# Altium PCB BauhallenUhr_Variante_4.PcbDoc (part 2 of 2)
Units mm, origin at the board's own origin, x right, y up, seen from the top; angles counter-clockwise.
Board outline 92.9 x 87.5 mm, 4 copper layers (Top Layer, Signal Layer 2, GND Layer 3, Bottom Layer), stack 1.54 mm thick; 119 components, 79 nets, 565 pads, 100 vias.
Unrouted connection lines stored in the file: 1.
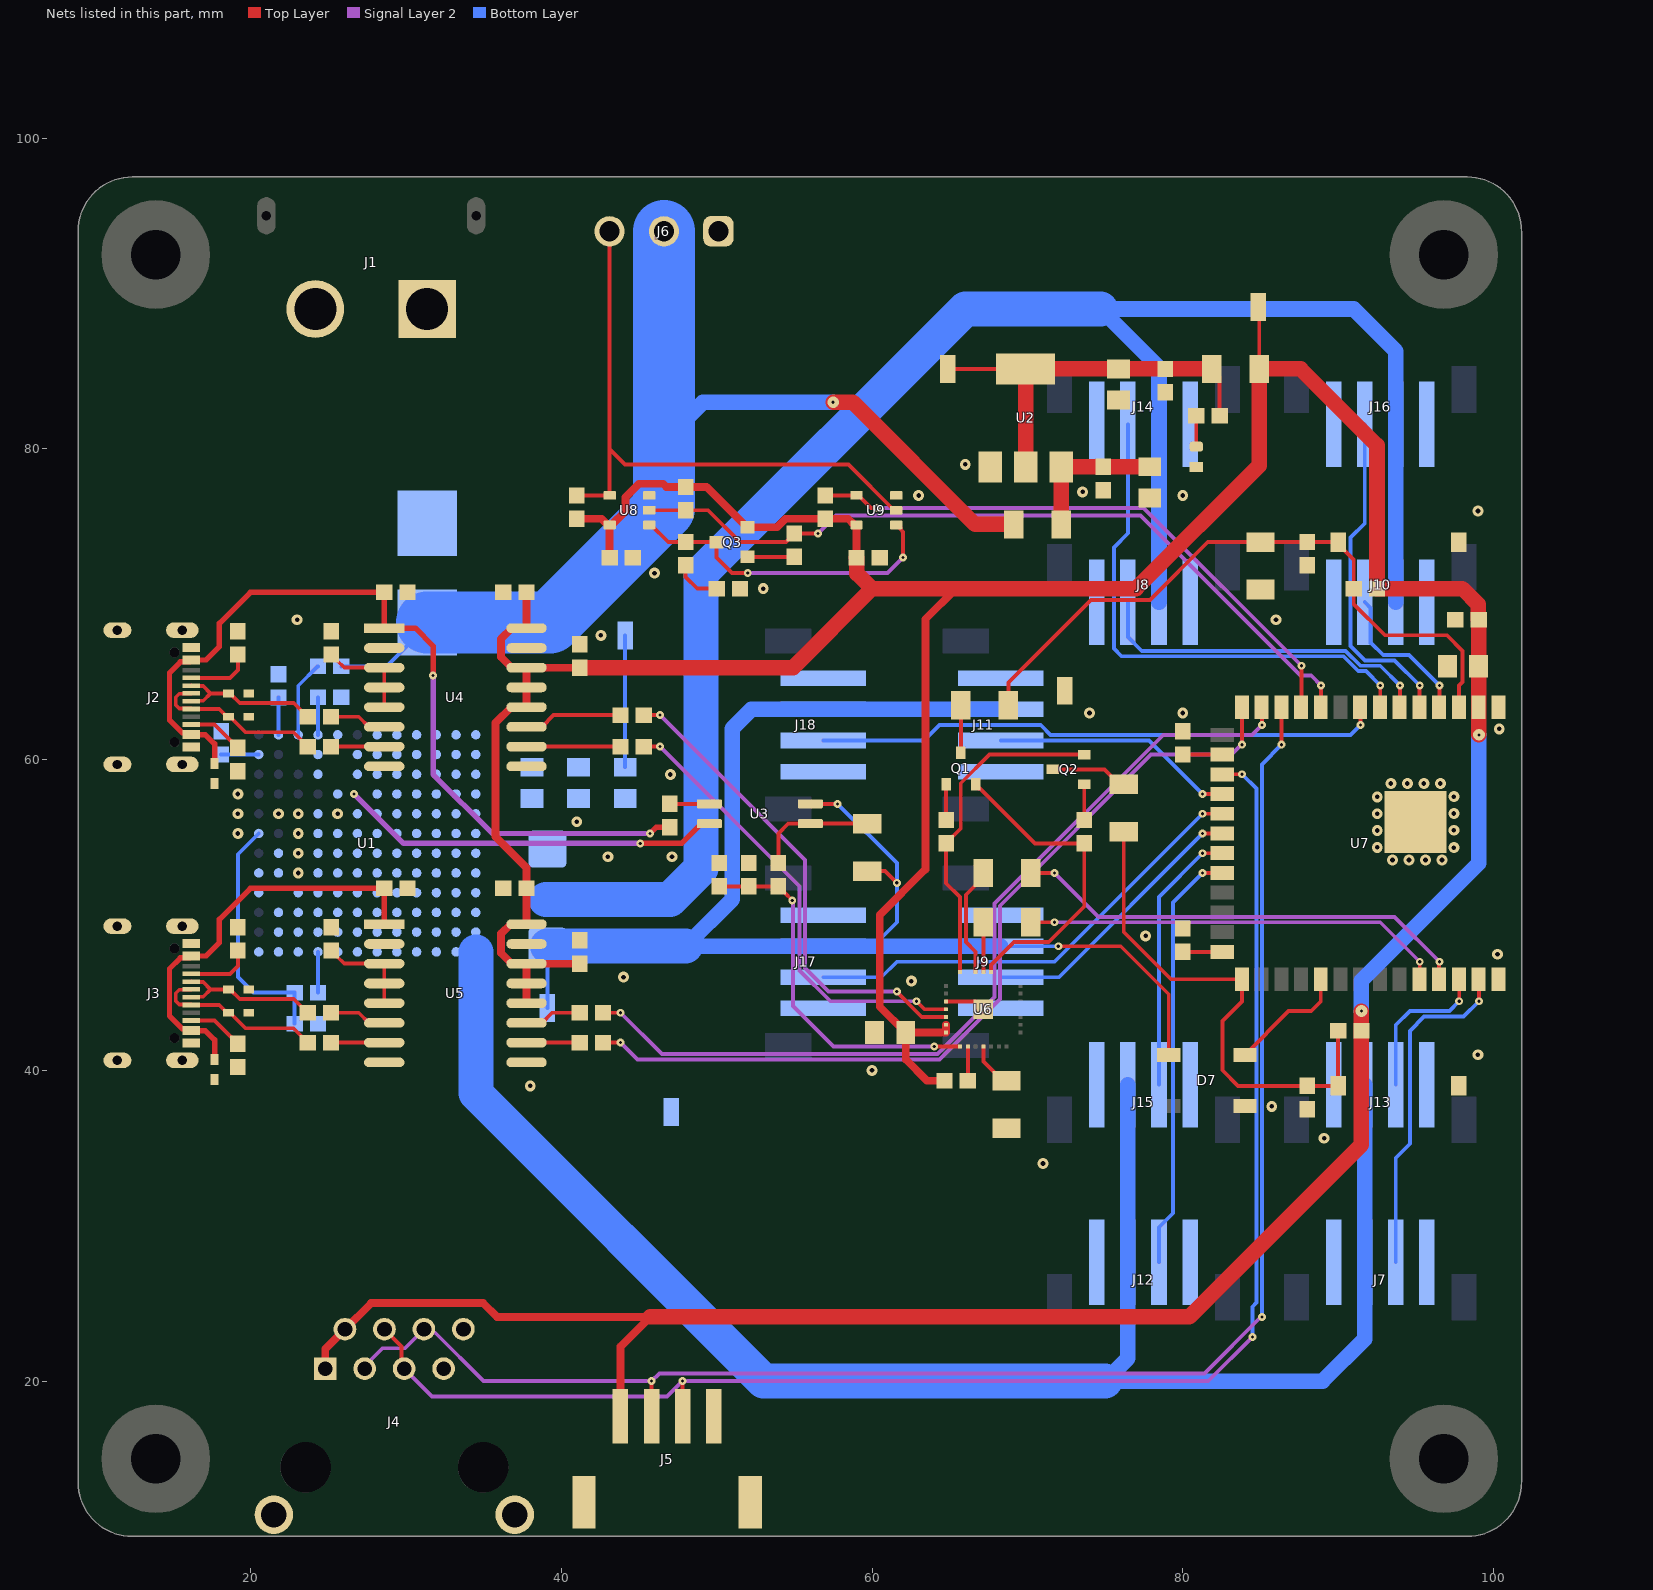
[diagram p4: the nets of this part, all layers, seen from the top]

## Part data
C1 C3 C5 C6 C7: library part Capacitor, "0603"
C2 C4 C9 C10 C11 C21 C22: library part Capacitor_0805, "0805"
C8: library part Capacitor_Tantalum, "470 µF Molded Tantalum Capacitors 6.3 V 2917 (7343 Metric) 100mOhm."
C12 C13 C14 C15 C16 C17 C18 C19 C20 C23 C24 C26 C27 C28: library part Capacitor_0603, "0603"
C25: library part Capacitor_1206, "1206"
D1 D2 D3 D4 D5 D6: library part ESD_Protection_Diode, ComponentLink1Description=Supplier, ComponentLink1URL=https://www.digikey.com/en/products/detail/onsemi/ESD5B5-0ST1G/1792206
F1: library part Fuse, "FUSE BRD MNT 10A 125VAC/VDC SMD"
J1: library part PCB_Connector, "Socket, DC supply, male, PIN: 2.", Package=Package, Check_prices=https://www.snapeda.com/parts/XT60PW-M/AMASS/view-part/?ref=eda, MF=AMASS, MP=XT60PW-M, SnapEDA_Link=https://www.snapeda.com/parts/XT60PW-M/AMASS/view-part/?ref=snap
J2 J3: "USB - C - Port"
J4: library part RJ45, "Jack Modular Connector 8p8c (RJ45, Ethernet) 90Â° Angle (Right) Shielded Cat3.", Package=None, Check_prices=https://www.snapeda.com/parts/RJE091884511C/Amphenol/view-part/?ref=eda, MF="Amphenol ICC (Commercial Products)", MP=RJE091884511C, SnapEDA_Link=https://www.snapeda.com/parts/RJE091884511C/Amphenol/view-part/?ref=snap, System=Connector
J5: library part Connector_SMD_Lying_Small_Symbol, "Connector Header Surface Mount, Right Angle 4 position 0.079 (2.00mm).", ComponentLink1Description=Supplier, ComponentLink1URL=https://www.digikey.ch/de/products/detail/jst-sales-america-inc/S4B-PH-SM4-TB/926657?s=N4IgTCBcDaIMoBYBCBaACgCRXAsglAKkiALoC%2BQA
J6: library part Screw_Connector, "691214110003 Wurth Elektronik"
J7 J8 J9 J10 J11 J12 J13 J14 J15 J16 J17 J18: library part Connector_SMD, "CONN HEADER SMD 4POS 2MM.", ComponentLink1Description=Supplier, ComponentLink1URL=https://www.digikey.ch/en/products/detail/jst-sales-america-inc/B4B-PH-SM4-TB/926643
LED1: library part "LED_0603, GREEN", "LED 0603, Green, 3.2 V, 20 mA, 430 mcd"
MEC1 MEC2 MEC3 MEC4: "Mounting Hole for M3 Screw, plated to connect signal"
Q1 Q2: library part NPN_Bipolar_Transistor, "SS8050 SOT - 23.", ComponentLink1Description=Supplier, ComponentLink1URL=https://www.digikey.com/en/products/detail/guangdong-inmark-electronics-co-ltd/SS8050/28539054
Q3: library part PNP_Bipolar_Transistor, "Bipolar (BJT) Transistor PNP 25 V 500 mA 150MHz 300 mW Surface Mount SOT-23."
R1 R3 R4 R5 R7 R8 R9 R10 R11 R12 R13 R15 R16 R17 R18 R20 R22 R23 R24 R25 R27 R28 R29 R32 R33 R34 R35 R36 R37 R38 R39 R40: library part Resistor_0603, "0603"
R2 R6 R14 R19 R21 R26 R30 R31: library part Resistor_1206, "1206"
S1 S2: library part Button
TP1 TP2 TP3 TP4 TP5 TP6: "Prüfstecker und Messbuchsen EZ BoardWare S27 SMT Mini Test Terminal, Reel"
U1: library part DCDC_Converter, "Module DC-DC 1-OUT 0.6V to 5V 15A Automotive 133-Pin BGA Tray.", Package="BGA -133 Analog Devices", Availability="In Stock", Check_prices=https://www.snapeda.com/parts/LTM4627EY%23PBF/Analog+Devices/view-part/?ref=eda, MF="Analog Devices", MP=LTM4627EY#PBF, Price=None, Purchase-URL=https://pricing.snapeda.com/search/part/LTM4627EY#PBF/?ref=eda, SnapEDA_Link=https://www.snapeda.com/parts/LTM4627EY%23PBF/Analog+Devices/view-part/?ref=snap
U2: "LDO, 3.3V and 800mA.", ComponentLink1Description=Datasheet, ComponentLink1URL=chrome-extension://efaidnbmnnnibpcajpcglclefindmkaj/https://www.st.com/content/ccc/resource/technical/document/datasheet/99/3b/7d/91/91/51/4b/be/CD00000544.pdf/files/CD00000544.pdf/jcr:content/translations/en.CD00000544.pdf, ComponentLink2Description=Supplier, ComponentLink2URL=https://www.digikey.ch/en/products/detail/stmicroelectronics/LD1117S33CTR/585765
U3: library part Optocoupler, "Optoisolator Transistor Output 3750Vrms 1 Channel 4-SO."
U4 U5: library part USB_Digital_Isolator, "DGT ISOL 2500VRMS 2CH USB 16SOIC."
U6: "USB to UART bridge.", ComponentLink1Description=Datasheet, ComponentLink1URL=chrome-extension://efaidnbmnnnibpcajpcglclefindmkaj/https://www.silabs.com/documents/public/data-sheets/cp2102n-datasheet.pdf, ComponentLink2Description=Supplierlink, ComponentLink2URL=https://www.digikey.ch/en/products/detail/silicon-laboratories-inc/CP2102N-A02-GQFN28R/9863486?utm_source=findchips&utm_medium=aggregator&utm_campaign=buynow
U7: library part ESP32-S3-WROOM-2-N32R16V, "Bluetooth, WiFi 802.11b/g/n, Bluetooth v5.0 Transceiver Module 2.4GHz PCB Trace Surface Mount", Manufacturer="Espressif Systems", Supplier 1 Part Number=1965-ESP32-S3-WROOM-2-N32R16VCT-ND, Supplier 2 Part Number=356-SP32S3WM2N32R16V, Assembly Technology=SMD, ComponentLink1Description="Show Datasheet on SMS Drive", ComponentLink1URL="P:\Electronic Workshop\Datasheets (Refered in Libraries - Don't Change!)\ESP32-S3-WROOM-2-N32R16V_Digikey_1965-ESP32-S3-WROOM-2-N32R16VCT-ND.pdf", Latest Revision Date=17.10.2025, Latest Revision Made By="Simon Gimple", Latest Revision Note="New Part", Manufacturer Part Number=ESP32-S3-WROOM-2-N32R16V, Supplier 1=DigiKey, Supplier 2=Mouser
U8: library part Single_Bus_Buffer_Gate, "Single Bus Buffer Gate With 3-State Outputs, DBV0005A, LARGE T&R.", ComponentLink1Description=Supplier, ComponentLink1URL=https://www.digikey.com/en/products/detail/texas-instruments/SN74LVC1G126DBVR/385722
U9: library part Single_Bus_Buffer_Gate_Inverted, "Single Bus Buffer Gate With 3-State Outputs, DBV0005A, LARGE T&R.", ComponentLink1Description=Supplier

## Via types
v1: diameter 0.508, hole 0.203, Top Layer to Bottom Layer, 45 vias
v2: diameter 0.7, hole 0.3, Top Layer to Bottom Layer, 36 vias
v3: diameter 0.7, hole 0.3, Top Layer to Bottom Layer, tented top, 16 vias
v4: diameter 0.75, hole 0.2, Top Layer to Bottom Layer, 3 vias

## Nets (pads, with @x,y where several pads share a name; then routed paths per layer and width w, separated by ;. In a path a pad name is that pad's centre, name@x,y a point inside that pad or via, vN(x,y) a via of type N, cw(c..) or ccw(c..) an arc to the next point about the centre after c; other vN are vias at no path point)
+3.3V: C17.2 C18.2 C19.2 C20.2 C21.2 C22.1 C23.2 C27.2 C28.2 J4.1 J4.2 J5.1 Q3.2 R6.2 R20.1 R27.2 R32.2 R38.2 R39.2 R40.2 TP3.1 U4.12 U4.13 U4.14 U4.16 U5.12 U5.13 U5.14 U5.16 U6.6 U6.7 U7.2 U8.5 U9.5 | length 310.3
  Top Layer w0.25: TP3.1@84.87,89.14 84.924,89.086 R6.2@84.924,85.14
  Top Layer w0.5: J4.1@24.809,20.8 24.809,22.07 J4.2@26.079,23.34 27.759,25.02 34.98,25.02 35.87,24.13 45.72,24.13 43.81,22.22 43.81,19.55 ; U5.12@37.763,44.325 U5.13@37.763,45.595 U5.14@37.763,46.865 ; C19.2@37.763,70.76 U4.16@37.763,68.455 36.808,68.455 36.114,67.761 36.114,66.609 36.808,65.915 U4.14@37.763,65.915 ; R39.2@41,75.5 42.585,75.5 42.985,75.1 U8.5@43.11,75.1 ; C18.2@41.185,46.865 U5.14@37.763,46.865 ; C17.2@41.185,65.915 U4.14@37.763,65.915 ; C27.2@43.11,73 U8.5@43.11,75.1 ; C28.2@59,73 U9.5@59,75.1 58.875,75.1 58.475,75.5 R40.2@57,75.5 54.43,75.5 53.88,74.95 Q3.2@52,74.95 51.95,74.95 49.35,77.55 R38.2@48,77.55 46.75,77.55 46.55,77.75 45,77.75 44.13,76.88 44.13,75.995 43.235,75.1 U8.5@43.11,75.1 ; R20.1@64.665,39.335 63.535,39.335 62.165,40.705 C21.2@62.165,42.435 ; U6.6@64.765,42.935 U6.7@64.765,42.435 C21.2@62.165,42.435 ; 65.405,71 63.435,69.03 63.435,52.935 60.5,50 60.5,44.1 C21.2@62.165,42.435 ; U5.14@37.763,46.865 36.808,46.865 36.114,47.559 36.114,48.814 36.151,48.814 36.742,49.405 U5.16@37.763,49.405 C20.2@37.763,51.71 37.763,53.042 35.767,55.038 35.767,62.367 36.775,63.375 U4.12@37.763,63.375 U4.13@37.763,64.645 U4.14@37.763,65.915
  Top Layer w1: C17.2@41.185,65.915 54.915,65.915 60,71 ; 45.72,24.13 80.421,24.13 91.5,35.209 R32.2@91.5,42.545 v4(91.5,43.815) ; C28.2@59,73 59.025,73 59.025,71.975 60,71 ; v4(99.06,61.595) 99.06,63.34 U7.2@99.04,63.36 C22.1@99.04,66 C23.2@99.04,69 99.015,69 99.015,69.985 98,71 R27.2@92.5,71 92.5,80.22 87.58,85.14 R6.2@84.924,85.14 84.924,78.924 77,71 65.405,71 60,71
  Bottom Layer w1: v4(91.5,43.815) 91.5,45.78 99.06,53.34 v4(99.06,61.595)
+5V: C1.2 C8.1 D7.1 J7.2 J8.2 J9.2 J10.2 J11.2 J12.2 J13.2 J14.2 J15.2 J16.2 J17.2 J18.2 R14.1 TP4.1 U1.J1 U1.J2 U1.J3 U1.J4 U1.J5 U1.J6 U1.J7 U1.J8 U1.J9 U1.J10 U1.K1 U1.K2 U1.K3 U1.K4 U1.K5 U1.K6 U1.K7 U1.K8 U1.K9 U1.K10 U1.K11 U1.L1 U1.L2 U1.L3 U1.L4 U1.L5 U1.L6 U1.L7 U1.L8 U1.L9 U1.L10 U1.L11 U1.M1 U1.M2 U1.M3 U1.M4 U1.M5 U1.M6 U1.M7 U1.M8 U1.M9 U1.M10 U1.M11 U3.4 | length 330.6
  Top Layer w0.25: U3.4@56.03,57.15 v1(57.785,57.15) ; R14.1@59.69,52.826 60.839,52.826 v1(61.595,52.07) ; v1(71.99,47.99) 76.01,47.99 79.1,44.9 D7.1@79.1,41
  Bottom Layer w0.25: C1.2@24.34,45 U1.M9@24.34,47.625 ; TP4.1@39.11,44 C8.1@39.11,48 ; v1(57.785,57.15) 61.595,53.34 v1(61.595,52.07) 61.595,49.53 60.055,47.99 ; J9.2@68.29,47.99 v1(71.99,47.99)
  Bottom Layer w1: 48,48 51,51 51,62 52.23,63.23 J18.2@56.86,63.23 J11.2@68.29,63.23 ; 48.01,47.99 J17.2@56.86,47.99 60.055,47.99 J9.2@68.29,47.99 ; J15.2@76.47,39.08 J12.2@76.47,27.65 76.47,21.47 75,20 89,20 91.71,22.71 J7.2@91.71,27.65 J13.2@91.71,39.08 ; J8.2@78.47,70.14 J14.2@78.47,81.57 78.47,85.231 74.701,89 91,89 93.71,86.29 J16.2@93.71,81.57 J10.2@93.71,70.14
  Bottom Layer w2.25: U1.M1@34.5,47.625 34.5,38.525 53.025,20 75,20 ; 39,51 47,51 49,53 49,72 66,89 74.701,89 ; C8.1@39.11,48 48,48
+12V: C9.2 C10.2 C11.2 F1.2 J6.2 R2.1 R3.2 TP1.1 U1.A1 U1.A2 U1.A3 U1.A4 U1.A5 U1.A6 U1.B1 U1.B2 U1.B3 U1.B4 U1.B5 U1.B6 U1.C1 U1.C2 U1.C3 U1.C4 U1.C5 U1.C6 | length 78.5
  Top Layer w1: v4(57.5,83) 58.772,83 66.632,75.14 69.044,75.14 R2.1@69.23,75.326 ; R2.1@69.127,75.14 R2.1@69.127,75.224
  Bottom Layer w0.25: R3.2@25.84,66 28.751,66 31.369,68.618 F1.2@31.369,68.834 ; C9.2@44.11,59.504 TP1.1@44.11,68
  Bottom Layer w1: 46.61,80.5 49.11,83 v4(57.5,83)
  Bottom Layer w4: F1.2@31.369,68.834 39.274,68.834 46.61,76.17 46.61,80.5 J6.2@46.61,94
D1: J7.3 U7.39 | length 21.9
  Top Layer w0.25: U7.39@99.04,45.86 99.06,45.84 v1(99.06,44.45)
  Bottom Layer w0.25: J7.3@93.71,27.65 93.71,34.37 94.615,35.275 94.615,42.545 95.535,43.465 98.075,43.465 v1(99.06,44.45)
D2: J13.3 U7.38 | length 10
  Top Layer w0.25: U7.38@97.77,45.86 97.79,45.84 v1(97.79,44.45)
  Bottom Layer w0.25: J13.3@93.71,39.08 93.71,42.91 94.615,43.815 97.155,43.815 v1(97.79,44.45)
D3: J10.3 U7.4 | length 9.8
  Top Layer w0.25: U7.4@96.5,63.36 96.52,63.38 v1(96.52,64.77)
  Bottom Layer w0.25: J10.3@91.71,70.14 92.085,69.765 92.085,67.515 92.124,67.515 92.899,66.74 94.55,66.74 v1(96.52,64.77)
D4: J16.3 U7.5 | length 21.6
  Top Layer w0.25: U7.5@95.23,63.36 95.23,64.75 v1(95.25,64.77)
  Bottom Layer w0.25: J16.3@91.71,81.57 91.71,75.2 90.805,74.295 90.805,67.31 91.725,66.39 93.63,66.39 v1(95.25,64.77)
D5: J8.3 U7.6 | length 22.5
  Top Layer w0.25: U7.6@93.96,63.36 93.98,63.38 v1(93.98,64.77)
  Bottom Layer w0.25: J8.3@76.47,70.14 76.47,67.89 77.36,67 90.48,67 91.44,66.04 92.71,66.04 v1(93.98,64.77)
D6: J14.3 U7.7 | length 34.3
  Top Layer w0.25: U7.7@92.69,63.36 92.71,63.38 v1(92.71,64.77)
  Bottom Layer w0.25: J14.3@76.47,81.57 76.47,74.565 75.565,73.66 75.565,67.146 76.061,66.65 90.335,66.65 91.295,65.69 91.79,65.69 v1(92.71,64.77)
D7: J11.3 U7.18 | length 15.7
  Top Layer w0.25: v1(81.28,57.785) U7.18@82.55,57.785
  Bottom Layer w0.25: J11.3@68.29,61.23 77.835,61.23 v1(81.28,57.785)
D8: J17.3 U7.19 | length 30
  Top Layer w0.25: v1(81.28,56.515) U7.19@82.55,56.515
  Bottom Layer w0.25: J17.3@56.86,45.99 60.595,45.99 61.595,46.99 71.755,46.99 v1(81.28,56.515)
D9: J9.3 U7.20 | length 18.1
  Top Layer w0.25: v1(81.28,55.245) U7.20@82.55,55.245
  Bottom Layer w0.25: J9.3@68.29,45.99 72.025,45.99 v1(81.28,55.245)
D10: J15.3 U7.21 | length 17.3
  Top Layer w0.25: v1(81.28,53.975) U7.21@82.55,53.975
  Bottom Layer w0.25: J15.3@78.47,39.08 78.47,51.165 v1(81.28,53.975)
D11: J12.3 U7.22 | length 27.5
  Top Layer w0.25: v1(81.28,52.705) U7.22@82.55,52.705
  Bottom Layer w0.25: J12.3@78.47,27.65 78.47,29.9 79.375,30.805 79.375,50.8 v1(81.28,52.705)
D12: J18.3 U7.8 | length 36.7
  Top Layer w0.25: U7.8@91.42,63.36 91.44,63.34 v1(91.44,62.23)
  Bottom Layer w0.25: J18.3@56.86,61.23 63.352,61.23 64.353,62.23 70.858,62.23 71.493,61.595 90.805,61.595 v1(91.44,62.23)
DATA: J6.3 R39.1 U8.4 U9.2 | length 39.2
  Top Layer w0.25: R39.1@41,77 U8.4@43.11,77 43.11,80 ; J6.3@43.11,94 43.11,80 ; U9.2@61.55,76.05 61.425,76.05 58.475,79 44.11,79 43.11,80
DTR: Q2.2 R28.2 U6.28 | length 21.6
  Top Layer w0.25: U6.28@65.665,46.335 65.665,51.15 64.77,52.045 R28.2@64.77,54.61 64.77,54.635 65.711,55.576 65.711,58.479 67.552,60.32 Q2.2@73.66,60.32
EN: C24.2 C25.2 R27.1 R30.2 S1.2 U7.3 | length 42.8
  Top Layer w0.25: R30.2@68.774,63.5 68.774,64.964 74.085,70.275 77.883,70.275 81.608,74 C25.2@85,74 C24.2@88,74 S1.2@90,74 90,73.875 91,72.875 R27.1@91,71 91,70.025 93.025,68 97,68 98,67 98,65 97.77,64.77 U7.3@97.77,63.36
GND: C2.1 C3.1 C4.1 C5.1 C6.1 C7.1 C8.2 C9.1 C10.1 C11.1 C14.1 C17.1 C18.1 C19.1 C20.1 C21.1 C22.2 C23.1 C24.1 C25.1 C26.1 C27.1 C28.1 D7.3 J1.2 J4.7 J4.8 J4.SH1 J4.SH2 J5.4 J5.SH1 J5.SH2 J6.1 J7.1 J7.4 J8.1 J8.4 J9.1 J9.4 J10.1 J10.4 J11.1 J11.4 J12.1 J12.4 J13.1 J13.4 J14.1 J14.4 J15.1 J15.4 J16.1 J16.4 J17.1 J17.4 J18.1 J18.4 LED1.K R1.1 R5.1 R13.2 R26.2 R33.1 R34.1 R37.1 S1.1 S2.1 TP5.1 TP6.1 U1.A8 U1.B7 U1.B9 U1.C7 U1.C9 U1.D1 U1.D2 U1.D3 U1.D4 U1.D5 U1.D6 U1.D8 U1.E1 U1.E2 U1.E3 U1.E4 U1.E5 U1.E6 U1.E7 U1.E9 U1.F1 U1.F2 U1.F3 U1.F4 U1.F5 U1.F6 U1.F7 U1.F8 U1.F9 U1.G1 U1.G2 U1.G3 U1.G4 U1.G5 U1.G6 U1.G7 U1.G8 U1.G9 U1.G11 U1.H1 U1.H2 U1.H3 U1.H4 U1.H5 U1.H6 U1.H7 U1.H8 U1.H9 U1.H11 U1.H12 U1.J12 U1.M12 U2.1 U4.9 U4.15 U5.9 U5.15 U6.3 U6.29 U7.1 U7.40 U7.41 U8.3 U9.3 | length 2.6
  Top Layer w0.25: U6.3@64.765,44.435 66.665,44.435 U6.29@67.165,43.935
  other v2: 71,34 89.096,35.633 85.729,37.681 38,39 60,40 98.989,41.007 62.53,45.745 44,46 100.25,47.468 77.608,48.652 23.07,52.705 43,53.746 47.124,53.746 23.07,53.975 19.185,55.245 23.07,55.245 41,56 19.185,56.515 21.8,56.515 23.07,56.515 25.61,56.515 19.185,57.785 47.019,59.045 100.364,61.975 74,63 80,63 42.551,67.996 23,69 86,69 53,71 46,72 99,76 63,77 80,77 73.556,77.23 66,79
  other v3: 93.496,53.533 94.558,53.533 95.62,53.533 96.682,53.533 92.52,54.349 97.445,54.333 92.52,55.433 97.445,55.449 92.52,56.517 97.445,56.533 92.52,57.601 97.445,57.617 93.395,58.458 94.457,58.458 95.519,58.458 96.581,58.458
GND_A: C12.1 C15.2 D1.A D3.A D5.A J2.A1_B12 J2.B1_A12 J2.SH1 J2.SH2 J2.SH3 J2.SH4 R7.1 R8.1 U3.2 U4.2 U4.8 | length 24.7
  Top Layer w0.35: v1(45.085,54.61) 47.74,54.61 49.01,55.88 U3.2@49.53,55.88
  Signal Layer 2 w0.35: v1(26.67,57.785) 29.845,54.61 v1(45.085,54.61)
GND_B: C13.1 C16.2 D2.A D4.A D6.A J3.A1_B12 J3.B1_A12 J3.SH1 J3.SH2 J3.SH3 J3.SH4 R9.1 R10.1 U5.2 U5.8
GPIO0: C26.2 R31.2 R32.1 S2.2 U7.27 | length 33.1
  Top Layer w0.25: R31.2@76.2,55.366 76.2,48.895 79.235,45.86 U7.27@83.8,45.86 83.8,44.43 82.55,43.18 82.55,40.005 83.555,39 C26.2@88,39 S2.2@90,39 R32.1@90,42.545
GPIO19: D4.K J3.A7 J3.B7 R17.2 | length 9.8
  Top Layer w0.25: J3.A7@16.185,44.71 16.21,44.735 16.96,44.735 17.435,45.21 ; J3.B7@16.185,45.71 16.21,45.685 16.96,45.685 17.435,45.21 ; R17.2@23.685,43.71 23.66,43.71 22.785,44.585 19.31,44.585 18.685,45.21 D4.K@18.585,45.21 17.435,45.21
GPIO19_2: R24.1 U7.13 | length 56.9
  Top Layer w0.25: R24.1@42.685,43.71 v1(43.815,43.71) ; U7.13@85.07,63.36 85.09,63.34 v1(85.09,62.23)
  Signal Layer 2 w0.25: v1(43.815,43.71) 46.475,41.05 64.206,41.05 67.882,44.725 67.882,50.736 78.74,61.595 84.455,61.595 v1(85.09,62.23)
GPIO20: D6.K J3.A6 J3.B6 R18.2 | length 11.2
  Top Layer w0.25: J3.A6@16.185,45.21 16.16,45.185 15.41,45.185 15.185,44.96 15.185,44.46 15.41,44.235 16.16,44.235 J3.B6@16.185,44.21 17.985,44.21 18.485,43.71 D6.K@18.585,43.71 18.685,43.71 19.685,42.71 22.76,42.71 R18.2@23.685,41.785
GPIO20_2: R25.1 U7.14 | length 55.9
  Top Layer w0.25: R25.1@42.685,41.785 v1(43.815,41.785) ; U7.14@83.8,63.36 83.82,63.34 v1(83.82,60.96)
  Signal Layer 2 w0.25: v1(43.815,41.785) 44.9,40.7 64.351,40.7 68.231,44.58 68.231,50.592 77.965,60.325 83.143,60.325 83.778,60.96 v1(83.82,60.96)
NetC1_1: C1.1 R1.2 U1.F12 | length 15.9
  Bottom Layer w0.25: U1.F12@20.53,55.245 19.19,53.905 19.19,46 20.19,45 C1.1@22.84,45 R1.2@22.84,43
NetC2_2: C2.2 C3.2 R2.2 U2.3 | length 9.4
  Top Layer w1: R2.2@72.181,75.14 U2.3@72.181,78.841 C3.2@74.87,78.841 C2.2@77.87,78.841
NetC4_2: C4.2 C5.2 R4.2 R6.1 TP2.1 U2.2 U2.4 | length 26.5
  Top Layer w0.25: TP2.1@64.87,85.14 U2.4@69.87,85.14 ; R6.1@81.87,85.14 82.37,84.64 R4.2@82.37,82.14
  Top Layer w1: U2.2@69.895,78.841 69.895,85.115 U2.4@69.87,85.14 C4.2@75.87,85.14 C5.2@78.87,85.14 R6.1@81.87,85.14
NetC6_2: C6.2 U1.A9 | length 2.4
  Bottom Layer w0.25: U1.A9@24.34,61.595 C6.2@24.34,64
NetC7_2: C7.2 U1.A11 | length 2.4
  Bottom Layer w0.25: U1.A11@21.8,61.595 C7.2@21.8,64
NetC14_2: C14.2 R12.2 R13.1 U6.8 | length 23.7
  Top Layer w0.25: C14.2@50.165,51.84 R13.1@52.07,51.84 R12.2@53.975,51.84 ; v1@54.864,50.951 54.375,51.44 54.35,51.44 R12.2@53.975,51.815 ; v1(64.008,41.529) 64.014,41.535 U6.8@65.665,41.535 ; R12.2@53.975,51.815 R12.2@53.975,51.84 ; R12.2@53.975,51.815 R12.2@53.975,51.84
  Signal Layer 2 w0.25: v1(54.864,50.927) 54.913,50.878 54.913,44.147 57.531,41.529 v1(64.008,41.529)
NetC15_1: C15.1 U4.3 U4.4 U4.5 | length 6.3
  Top Layer w0.25: C15.1@25.185,66.76 25.185,66.735 25.56,66.36 25.585,66.36 26.03,65.915 U4.3@28.607,65.915 U4.4@28.607,64.645 U4.5@28.607,63.375
NetC16_1: C16.1 U5.3 U5.4 U5.5 | length 6.3
  Top Layer w0.25: C16.1@25.185,47.71 25.185,47.685 25.56,47.31 25.585,47.31 26.03,46.865 U5.3@28.607,46.865 U5.4@28.607,45.595 U5.5@28.607,44.325
NetD7_4: D7.4 U7.31 | length 7.7
  Top Layer w0.25: D7.4@84,41 86.815,43.815 88.265,43.815 88.88,44.43 U7.31@88.88,45.86
NetF1_1: F1.1 J1.1
NetJ2_A5: J2.A5 R8.2 | length 4.2
  Top Layer w0.25: J2.A5@16.185,65.26 18.685,65.26 19.185,65.76 R8.2@19.185,66.76
NetJ2_B5: J2.B5 R7.2 | length 3.6
  Top Layer w0.25: J2.B5@16.185,62.26 17.685,62.26 18.785,61.16 18.81,61.16 19.185,60.785 R7.2@19.185,60.76
NetJ3_A5: J3.A5 R10.2 | length 4.2
  Top Layer w0.25: J3.A5@16.185,46.21 18.685,46.21 19.185,46.71 R10.2@19.185,47.71
NetJ3_B5: J3.B5 R9.2 | length 3.6
  Top Layer w0.25: J3.B5@16.185,43.21 17.685,43.21 18.785,42.11 18.81,42.11 19.185,41.735 R9.2@19.185,41.71
NetLED1_A: LED1.A R4.1 | length 2
  Top Layer w0.25: LED1.A@80.87,80.14 R4.1@80.87,82.14
NetQ1_1: Q1.1 R28.1 | length 2.3
  Top Layer w0.25: R28.1@64.77,56.11 Q1.1@64.77,58.42
NetQ1_3: Q1.3 R30.1 | length 3.1
  Top Layer w0.25: Q1.3@65.72,60.44 R30.1@65.72,63.5
NetQ2_1: Q2.1 R29.1 | length 2.3
  Top Layer w0.25: R29.1@73.66,56.11 Q2.1@73.66,58.42
NetQ2_3: Q2.3 R31.1 | length 5
  Top Layer w0.25: Q2.3@71.64,59.37 74.973,59.37 75.923,58.42 R31.1@76.2,58.42
NetQ3_1: Q3.1 R35.1 | length 3
  Top Layer w0.25: Q3.1@52,73.05 R35.1@55,73.05
NetR3_1: R3.1 U1.A10 | length 4.9
  Bottom Layer w0.25: U1.A10@23.07,61.595 23.07,64.755 24.315,66 R3.1@24.34,66
NetR5_2: R5.2 U1.B12 | length 2.4
  Bottom Layer w0.25: R5.2@18.11,60.325 U1.B12@20.53,60.325
NetR11_2: R11.2 U3.1 | length 2.5
  Top Layer w0.25: R11.2@46.99,57.15 U3.1@49.53,57.15
NetR12_1: R12.1 R14.2 U3.3 | length 7.9
  Top Layer w0.25: R12.1@53.975,53.34 53.975,55.245 54.61,55.88 U3.3@56.03,55.88 R14.2@59.69,55.88
NetR15_1: R15.1 U4.6 | length 3.7
  Top Layer w0.25: R15.1@25.185,62.76 26.964,62.76 27.619,62.105 U4.6@28.607,62.105
NetR16_1: R16.1 U4.7 | length 3.4
  Top Layer w0.25: R16.1@25.185,60.835 U4.7@28.607,60.835
NetR17_1: R17.1 U5.6 | length 3.7
  Top Layer w0.25: R17.1@25.185,43.71 26.964,43.71 27.619,43.055 U5.6@28.607,43.055
NetR18_1: R18.1 U5.7 | length 3.4
  Top Layer w0.25: R18.1@25.185,41.785 U5.7@28.607,41.785
NetR19_2: R19.2 U6.25 | length 3.2
  Top Layer w0.25: U6.25@67.165,46.335 R19.2@67.165,49.53
NetR20_2: R20.2 U6.9 | length 2.2
  Top Layer w0.25: R20.2@66.165,39.335 U6.9@66.165,41.535
NetR21_2: R21.2 U6.26 | length 7.1
  Top Layer w0.25: U6.26@66.665,46.335 66.665,47.635 66.04,48.26 66.04,51.303 67.165,52.428 R21.2@67.165,52.705
NetR22_2: R22.2 U4.11 | length 6.4
  Top Layer w0.25: U4.11@37.763,62.105 38.751,62.105 39.511,62.865 R22.2@43.815,62.865
NetR23_2: R23.2 U4.10 | length 6.1
  Top Layer w0.25: U4.10@37.763,60.835 R23.2@43.815,60.835
NetR24_2: R24.2 U5.11 | length 3.7
  Top Layer w0.25: U5.11@37.763,43.055 38.751,43.055 39.406,43.71 R24.2@41.185,43.71
NetR25_2: R25.2 U5.10 | length 3.4
  Top Layer w0.25: U5.10@37.763,41.785 R25.2@41.185,41.785
NetR26_1: R26.1 U6.11 | length 3
  Top Layer w0.25: U6.11@67.165,41.535 67.165,40.558 68.388,39.335 R26.1@68.665,39.335
NetR33_2: R33.2 U7.26 | length 2.5
  Top Layer w0.25: R33.2@80,47.625 U7.26@82.55,47.625
NetR34_2: R34.2 U7.16 | length 2.5
  Top Layer w0.25: R34.2@80,60.325 U7.16@82.55,60.325
NetR36_1: R36.1 R37.2 | length 3.1
  Top Layer w0.25: R36.1@48,72.5 48,71.75 48.75,71 R37.2@50,71
RTS: Q1.2 R29.2 U6.24 | length 20.7
  Top Layer w0.25: Q1.2@66.67,58.42 66.67,58.32 66.845,58.145 66.945,58.145 70.48,54.61 R29.2@73.66,54.61 73.66,50.546 71.374,48.26 69.147,48.26 67.665,46.778 U6.24@67.665,46.335
SCL: J4.4 J4.5 J5.3 U7.17 | length 100.2
  Top Layer w0.25: J4.4@28.619,23.34 29.728,22.231 29.728,20.961 J4.5@29.889,20.8 ; J5.3@47.81,17.75 v1(47.81,20) ; U7.17@82.55,59.055 v1(83.82,59.055)
  Signal Layer 2 w0.25: J4.5@29.889,20.8 31.689,19 46.81,19 v1(47.81,20) 81.637,20 v1(84.476,22.839)
  Bottom Layer w0.25: v1(83.82,59.055) 84.74,58.135 84.74,25.05 84.476,24.786 v1(84.476,22.839)
SDA: J4.3 J4.6 J5.2 U7.12 | length 104
  Top Layer w0.25: J5.2@45.81,17.75 v1(45.81,20) ; U7.12@86.34,63.36 86.36,63.34 v1(86.36,60.96)
  Signal Layer 2 w0.25: J4.3@27.349,20.8 27.349,20.97 28.491,22.112 29.932,22.112 J4.6@31.159,23.34 31.39,23.109 31.891,23.109 35,20 v1(45.81,20) 46.31,20.5 81.39,20.5 85.02,24.13 v1(85.09,24.13)
  Bottom Layer w0.25: v1(85.09,24.13) 85.09,59.69 v1(86.36,60.96)
TX_EN: Q3.3 R36.2 U8.1 U9.1 | length 21
  Top Layer w0.25: U8.1@45.66,75.1 45.785,75.1 46.885,74 R36.2@48,74 Q3.3@50,74 50,73 51,72 v1(52,72) ; U9.1@61.55,75.1 61.675,75.1 61.825,74.95 61.825,74.825 62,74.65 v1(62,73)
  Signal Layer 2 w0.25: v1(52,72) 61,72 v1(62,73)
U0_RXD: R19.1 U7.36 | length 27.2
  Top Layer w0.25: R19.1@70.219,49.53 v1(71.755,49.53) ; U7.36@95.23,45.86 95.25,45.88 v1(95.25,46.99)
  Signal Layer 2 w0.25: v1(71.755,49.53) 92.71,49.53 v1(95.25,46.99)
U0_TXD: R21.1 U7.37 | length 29.8
  Top Layer w0.25: R21.1@70.219,52.705 v1(71.755,52.705) ; U7.37@96.5,45.86 96.5,46.97 v1(96.52,46.99)
  Signal Layer 2 w0.25: v1(71.755,52.705) 74.58,49.88 93.63,49.88 v1(96.52,46.99)
U1_RXD: R40.1 U7.11 U9.4 | length 37.9
  Top Layer w0.25: R40.1@57,77 U9.4@59,77 59.125,77 59.925,76.2 v1(60.325,76.2) ; U7.11@87.61,63.36 87.63,63.38 v1(87.63,66.04)
  Signal Layer 2 w0.25: v1(60.325,76.2) 77.47,76.2 v1(87.63,66.04)
U1_TXD: R35.2 R38.1 U7.10 U8.2 | length 50.8
  Top Layer w0.25: U8.2@45.66,76.05 R38.1@48,76.05 49.45,76.05 51.5,74 54.475,74 55.025,74.55 v1(56.515,74.55) ; U7.10@88.88,63.36 88.9,63.38 v1(88.9,64.77)
  Signal Layer 2 w0.25: v1(56.515,74.55) 57.686,75.721 77.272,75.721 87.588,65.405 88.265,65.405 v1(88.9,64.77)
USB_DN: D3.K J2.A7 J2.B7 R15.2 | length 9.8
  Top Layer w0.25: J2.A7@16.185,63.76 16.21,63.785 16.96,63.785 17.435,64.26 ; J2.B7@16.185,64.76 16.21,64.735 16.96,64.735 17.435,64.26 ; R15.2@23.685,62.76 23.66,62.76 22.785,63.635 19.31,63.635 18.685,64.26 D3.K@18.585,64.26 17.435,64.26
USB_DN_2: R22.1 U6.5 | length 31.6
  Top Layer w0.25: R22.1@45.315,62.865 v1(46.355,62.865) ; v1(61.595,45.085) 61.595,45.043 63.203,43.435 U6.5@64.765,43.435
  Signal Layer 2 w0.25: v1(46.355,62.865) 55.693,53.527 55.693,46.58 57.188,45.085 v1(61.595,45.085)
USB_DP: D5.K J2.A6 J2.B6 R16.2 | length 11.2
  Top Layer w0.25: J2.A6@16.185,64.26 16.16,64.235 15.41,64.235 15.185,64.01 15.185,63.51 15.41,63.285 16.16,63.285 J2.B6@16.185,63.26 17.985,63.26 18.485,62.76 D5.K@18.585,62.76 18.685,62.76 19.685,61.76 22.76,61.76 R16.2@23.685,60.835
USB_DP_2: R23.1 U6.4 | length 29.6
  Top Layer w0.25: R23.1@45.315,60.835 v1(46.355,60.835) ; v1(62.865,44.45) 63.38,43.935 U6.4@64.765,43.935
  Signal Layer 2 w0.25: v1(46.355,60.835) 55.343,51.847 55.343,46.435 57.328,44.45 v1(62.865,44.45)
VBUS_A: C12.2 D1.K J2.A4_B9 J2.B4_A9 R11.1 U4.1 | length 55.7
  Top Layer w0.35: J2.B4_A9@16.185,61.61 16.06,61.735 15.596,61.735 14.785,62.546 14.785,65.589 15.481,66.285 16.081,66.285 J2.A4_B9@16.185,66.389 ; J2.A4_B9@16.185,66.41 17.14,66.41 18,67.27 18,68.77 19.99,70.76 C12.2@28.607,70.76 U4.1@28.607,68.455 30.605,68.455 31.75,67.31 v1(31.75,65.405) ; J2.B4_A9@16.339,61.61 17.083,61.61 17.685,61.008 D1.K@17.685,59.76 ; v1(45.72,55.245) 46.125,55.65 R11.1@46.99,55.65
  Signal Layer 2 w0.35: v1(31.75,65.405) 31.75,59.055 35.56,55.245 v1(45.72,55.245)
VBUS_B: C13.2 D2.K J3.A4_B9 J3.B4_A9 U5.1 | length 26.8
  Top Layer w0.35: J3.B4_A9@16.185,42.56 16.06,42.685 15.596,42.685 14.785,43.496 14.785,46.539 15.481,47.235 16.081,47.235 J3.A4_B9@16.185,47.339 ; J3.A4_B9@16.185,47.36 17.14,47.36 18,48.22 18,49.72 19.99,51.71 C13.2@28.607,51.71 U5.1@28.607,49.405 ; J3.B4_A9@16.339,42.56 17.083,42.56 17.685,41.958 D2.K@17.685,40.71
pads on no net: D7.2 J1.SH1 J1.SH2 J2. J2.A8 J2.B8 J3. J3.A8 J3.B8 J4. J7.SH1 J7.SH2 J8.SH1 J8.SH2 J9.SH1 J9.SH2 J10.SH1 J10.SH2 J11.SH1 J11.SH2 J12.SH1 J12.SH2 J13.SH1 J13.SH2 J14.SH1 J14.SH2 J15.SH1 J15.SH2 J16.SH1 J16.SH2 J17.SH1 J17.SH2 J18.SH1 J18.SH2 MEC1.1 MEC2.1 MEC3.1 MEC4.1 U1.A7 U1.A12 U1.B11 U1.C10 U1.C11 U1.C12 U1.D9 U1.D10 U1.D11 U1.D12 U1.E12 U1.F11 U1.G12 U1.K12 U1.L12 U6.1 U6.2 U6.10 U6.12 U6.13 U6.14 U6.15 U6.16 U6.17 U6.18 U6.19 U6.20 U6.21 U6.22 U6.23 U6.27 U7.9 U7.15 U7.23 U7.24 U7.25 U7.28 U7.29 U7.30 U7.32 U7.33 U7.34 U7.35

## Polygon pours and split planes (outlines as drawn)
GND on Bottom Layer "NONET_L-01_P-001" (solid, pour order 9): 7.5,97.5 102.5,97.5 102.5,10 7.5,10
+5V on Bottom Layer "NONET_L-01_P-001" (solid, pour order 0): 21.209,52.07 40.64,52.07 40.64,46.355 21.209,46.355
NetF1_1 on Bottom Layer "NONET_L-01_P-001" (solid, pour order 3): 27.559,72 27.559,92 35.179,92 35.179,72
+12V on Bottom Layer "NONET_L-01_P-001" (solid, pour order 4): 35.179,58.42 45.72,58.42 45.72,66 35.179,66
+12V on Bottom Layer "NONET_L-01_P-001" (solid, pour order 1): 27.559,58.42 27.559,72 35.179,72 35.179,58.42
GND on Top Layer "NONET_L-01_P-001" (solid, pour order 10): 7.5,97.5 102.5,97.5 102.5,10 7.5,10
GND_A on Top Layer "NONET_L-01_P-001" (solid, pour order 8): 8.89,72.39 33.02,72.39 33.02,54.61 8.89,54.61
GND_B on Top Layer "NONET_L-01_P-001" (solid, pour order 6): 8.89,54.61 33.02,54.61 33.02,36.83 8.89,36.83
GND on Signal Layer 2 "NONET_L-01_P-001" (solid, pour order 11): 7.5,97.5 102.5,97.5 102.5,10 7.5,10
GND on GND Layer 3 "NONET_L-01_P-001" (solid, pour order 12): 7.5,97.5 102.5,97.5 102.5,10 7.5,10

## Silkscreen, mask and mechanical layers (free items; w line width, h text height)
Top Overlay:
  drawing of 58 lines, arcs and shapes, not listed
  text "+3.3V" at 77.62,88.419 h2.5
  text "Servo" at 43.995,87.029 h2.5
  text "VOUT" at 57.12,84.419 h2.5
  text "+12V - Power" at 21,84.029 h2.5
  text "RST" at 92,77.029 h2.5
  text "USB to UART" at 10.002,75.029 h2.5
  text "GND" at 73.986,63.697 h2.5
  text "ESP - USB" at 10,35.029 h2.5
  text "BOOT" at 90.5,34.529 h2.5
  text "Brightness - Sensor" at 30,27.972 h2.5
  text "BauhallenUhr_V2.0 / Manuel Hueppi / 26.08.2026" at 60,12.5 h2
Bottom Overlay:
  lines w0.152: 54,29.5 59,29.5 ; 56.5,27 56.5,32 ; 62,25.5 67,25.5 ; 62,33.5 67,33.5 ; 64.5,23 64.5,28 ; 64.5,31 64.5,36 ; 53,22 53,37 68,37 68,22 53,22 ; 54,27 54,32 59,32 59,27 54,27 ; 62,23 62,28 67,28 67,23 62,23 ; 62,31 67,31 67,36 62,36 62,31
  text "+12V" at 51,67 h2.5
  text "+5V" at 37.763,43.334 h2.5
  text "LED - Matrices:" at 68,38.024 h2
  text "GND" at 45.576,36.519 h2.5
  text "6" at 63.5,34.268 h1.52
  text "4" at 66,34.25 h1.52
  text "5" at 63.5,31.768 h1.52
  text "3" at 66,31.768 h1.52
  text "7" at 58,30.25 h1.52
  text "12" at 55.846,30.24 h1.52
  text "8" at 55.5,27.768 h1.52
  text "9" at 57.997,27.768 h1.52
  text "10" at 64,26.268 h1.52
  text "2" at 66,26.25 h1.52
  text "11" at 64,23.75 h1.52
  text "1" at 66,23.75 h1.52
Mechanical 1:
  the board outline again, w0.254

## Text inside footprints (layer, text, board x,y; h text height)
J2: Mechanical 13 "PCB EDGE" at 8.93,58.61 h0.41 r270
J3: Mechanical 13 "PCB EDGE" at 8.93,39.56 h0.41 r270
J4: Mechanical 13 "PCB Edge" at 38.752,10.359 h0.81